# EAGLE board mrShark 01.a (EAGLE 5.11)
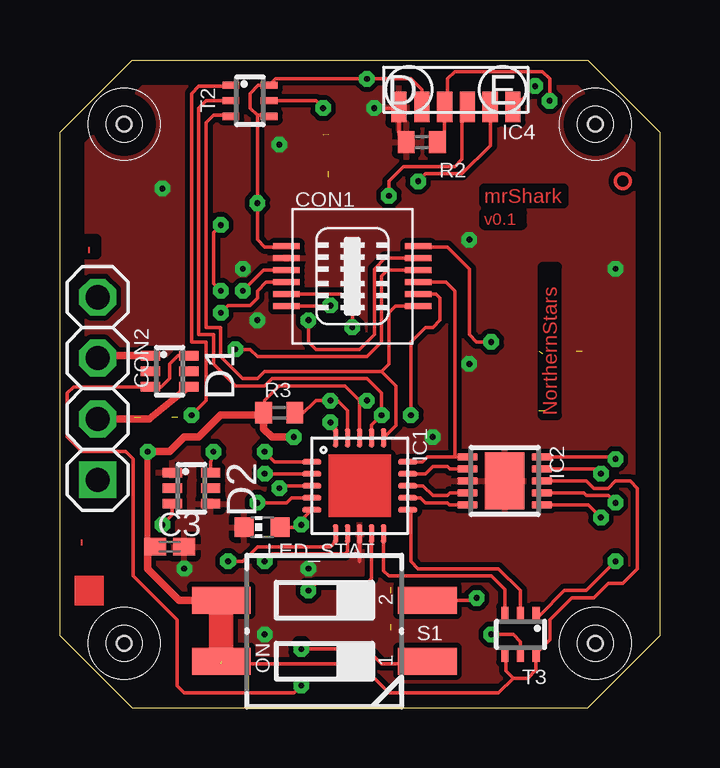
[diagram p0: board, top side]
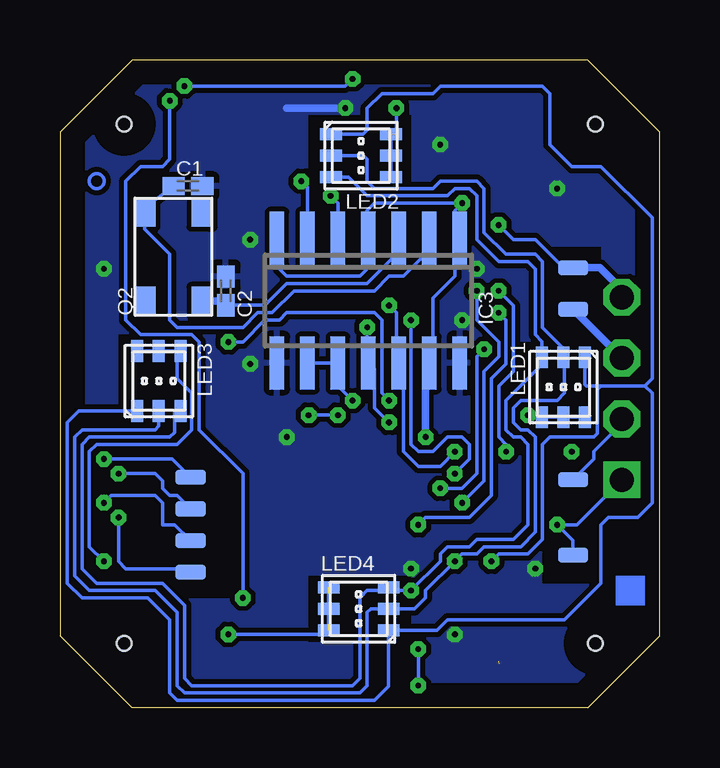
[diagram p1: board, bottom side, seen from below]

Size 25 x 27 mm. Coordinates in mm from the lower left corner, seen from the top.
Outline: 3,0 22,0 25,3 25,24 22,27 3,27 0,24 0,3 3,0
Copper layers (1*16): Top 0.035mm / dielectric 1.5mm / Bottom 0.035mm
Design rules "default": minimum track width 10mil, minimum drill 24mil, track to track 8mil, track to pad 8mil, pad to pad 8mil, via to via 8mil, smd to smd 8mil, copper to edge 40mil, drill to drill 8mil, minimum pad ring 10mil, minimum via ring 8mil, stop-mask expansion 4mil, vias tented up to drill 0mil, thermal gap 10mil
tRestrict: area 7.9,7 to 8.8,7.9
bRestrict: area 10.4,21.6 to 14.6,24.7; area 19.2,11.9 to 22.6,15.5; area 2.4,11.3 to 5.8,15.2; area 10.4,2.7 to 14.6,5.5; area 18,4.6 to 20.7,10.4; area 2.7,5.2 to 4.9,7.3; area 2.4,15.2 to 4.9,19.2

## Footprints (pad centres in the part's own frame; a part is rotated, then mirrored left to right if it is on the bottom)
SMD0,635-1,27 = smd 0.635 x 1.27: P$1 0,0
C0402K = smd 0.925 x 0.74: 1 -0.6,0; 2 0.6,0
DF23C-12DS = smd 0.25 x 1.1: 1 -1.25,-2.75; 2 -0.75,-2.75; 3 -0.25,-2.75; 4 0.25,-2.75; 5 0.75,-2.75; 6 1.25,-2.75; 7 1.25,2.75; 8 0.75,2.75; 9 0.25,2.75; 10 -0.25,2.75; 11 -0.75,2.75; 12 -1.25,2.75
1X04-S = drill 1.016 square: 1 -3.81,0 | drill 1.016 octagon: 2 -1.27,0; 3 1.27,0; 4 3.81,0
SOT363_PHILIPS = smd 0.4 x 0.8: 1 -0.65,-0.8; 2 0,-0.8; 3 0.65,-0.8; 4 0.65,0.8; 5 0,0.8; 6 -0.65,0.8
1,5 = hole 0.6: 0,0
MLF20 = smd 0.8 x 0.23: P$1 -2,1; P$2 -2,0.5; P$3 -2,0; P$4 -2,-0.5; P$5 -2,-1; P$11 2,-1; P$12 2,-0.5; P$13 2,0; P$14 2,0.5; P$15 2,1 | smd 0.23 x 0.8: P$6 -1,-2; P$7 -0.5,-2; P$8 0,-2; P$9 0.5,-2; P$10 1,-2; P$16 1,2; P$17 0.5,2; P$18 0,2; P$19 -0.5,2; P$20 -1,2
DFN10-3X3 = smd 0.3 x 0.85: 1 -1,-1.55; 2 -0.5,-1.55; 3 0,-1.55; 4 0.5,-1.55; 5 1,-1.55; 6 1,1.55; 7 0.5,1.55; 8 0,1.55; 9 -0.5,1.55; 10 -1,1.55 | smd 2.38 x 1.65: EXP 0,0
SO-14 = smd 0.6 x 2.2: 1 -3.81,-2.6; 2 -2.54,-2.6; 3 -1.27,-2.6; 4 0,-2.6; 5 1.27,-2.6; 6 2.54,-2.6; 7 3.81,-2.6; 8 3.81,2.6; 9 2.54,2.6; 10 1.27,2.6; 11 0,2.6; 12 -1.27,2.6; 13 -2.54,2.6; 14 -3.81,2.6
TFBS4711 = smd 0.635 x 1.27: 1 -2.38,0.72; 2 -1.43,0.72; 3 -0.48,0.72; 4 0.47,0.72; 5 1.42,0.72; 6 2.37,0.72
PLCC6 = smd 0.9 x 0.5: 1 1.25,-0.9; 2 1.25,0; 3 1.25,0.9; 4 -1.25,0.9; 5 -1.25,0; 6 -1.25,-0.9
CHIP-LED0603 = smd 0.8 x 0.8: A 0,-0.75; C 0,0.75
CFPX-104 = smd 1.2 x 0.9: P$1 -1.8,-1.2; P$2 1.9,1.2; P$3 -1.8,1.2; P$4 1.9,-1.2
R0402 = smd 0.7 x 0.9: 1 -0.65,0; 2 0.65,0
CTS-219-02 = smd 1.13 x 2.44: 1 -1.27,-4.3; 2 1.27,-4.3; 3 1.27,4.3; 4 -1.27,4.3
SOT363_INFINEON = smd 0.3 x 0.7: 1 -0.65,-0.8; 2 0,-0.8; 3 0.65,-0.8; 4 0.65,0.8; 5 0,0.8; 6 -0.65,0.8

## Placement (x,y rotation side)
BAT1+  [SMD0,635-1,27]  3.61,16.61 90 bottom
BAT1-  [SMD0,635-1,27]  3.61,18.34 90 bottom
BAT2+  [SMD0,635-1,27]  3.61,9.5 90 bottom
BAT2-  [SMD0,635-1,27]  3.61,6.35 90 bottom
C1  18p  [C0402K]  19.66,21.74 0 bottom
C2  18p  [C0402K]  18.08,17.37 90 bottom
C3  100n  [C0402K]  4.57,6.71 0 top
CON1  DF-23C-12DS-0.5V  [DF23C-12DS]  12.19,17.98 270 top
CON2  [1X04-S]  1.57,13.3 90 top
D1  BAS70-07S  [SOT363_PHILIPS]  4.57,14.02 270 top
D2  BAS70-07S  [SOT363_PHILIPS]  5.49,9.14 270 top
H1  MOUNT-HOLE1,5  [1,5]  2.68,2.68 0 top
H2  MOUNT-HOLE1,5  [1,5]  22.32,2.68 0 top
H3  MOUNT-HOLE1,5  [1,5]  22.32,24.32 0 top
H4  MOUNT-HOLE1,5  [1,5]  2.68,24.32 0 top
IC1  TINY4313MU  [MLF20]  12.5,9.25 0 top
IC2  A3901  [DFN10-3X3]  18.54,9.45 270 top
IC3  MCP2120-I/SL  [SO-14]  12.14,16.97 180 bottom
IC4  TFBS4711-TR1  [TFBS4711]  16.51,25.76 180 top
LED1  ASMT-YTD2-0BB02  [PLCC6]  4.01,13.36 90 bottom
LED2  ASMT-YTD2-0BB02  [PLCC6]  12.45,23.01 180 bottom
LED3  ASMT-YTD2-0BB02  [PLCC6]  20.88,13.61 270 bottom
LED4  ASMT-YTD2-0BB02  [PLCC6]  12.55,4.11 0 bottom
LED_STAT  green  [CHIP-LED0603]  8.43,7.52 90 top
MOTOR_L+  [SMD0,635-1,27]  19.56,9.6 90 bottom
MOTOR_L-  [SMD0,635-1,27]  19.56,8.28 90 bottom
MOTOR_R+  [SMD0,635-1,27]  19.56,6.96 90 bottom
MOTOR_R-  [SMD0,635-1,27]  19.56,5.64 90 bottom
Q2  14.7456MHz  [CFPX-104]  20.27,18.75 90 bottom
R2  1k  [R0402]  15.09,23.57 0 top
R3  1k  [R0402]  9.14,12.29 0 top
S1  MCEMR-02-T  [CTS-219-02]  11.02,3.2 90 top
T2  UMX3NTR  [SOT363_INFINEON]  7.92,25.3 270 top
T3  UMX3NTR  [SOT363_INFINEON]  19.2,3.05 180 top

## Library data of the parts
BAT1+ BAT1- BAT2+ BAT2- MOTOR_L+ MOTOR_L- MOTOR_R+ MOTOR_R- = wirepad
C1-C3 R2 R3 = rcl
CON1 = con-hirose
CON2 = pinhead-2
D1 D2 = diode
H1-H4 = holes
IC1 = avr-6
IC2 = allegro
IC3 = microchip
IC4 = vishay
LED1-LED4 LED_STAT = led
Q2 = crystal
S1 = switch-dil
T2 T3 = transistor-small-signal

## Nets
BAT1+: BAT1+.P$1 CON2.3 D1.1
BAT1-: BAT1-.P$1 CON2.4 D2.6
BAT2+: BAT2+.P$1 CON2.2 D1.4
BAT2-: BAT2-.P$1 CON2.1 D2.3
GND: C1.2 C2.2 C3.2 CON1.2 D2.1 D2.4 IC1.P$8 IC2.3 IC2.EXP IC3.8 IC3.14 IC4.6 LED_STAT.C R2.1
INT0: CON1.3 IC1.P$4
INT1: CON1.4 IC1.P$5 LED_STAT.A
LED1+: LED1.4 LED1.5 LED1.6 T2.1
LED2+: LED2.4 LED2.5 LED2.6 T2.5
LED3: IC1.P$11 T3.2
LED3+: LED3.4 LED3.5 LED3.6 T3.1
LED4: IC1.P$10 T3.3
LED4+: LED4.4 LED4.5 LED4.6 T3.5
LED_B: IC1.P$6 LED1.1 LED2.1 LED3.1 LED4.1
LED_G: IC1.P$7 LED1.2 LED2.2 LED3.2 LED4.2
LED_R: IC1.P$9 LED1.3 LED2.3 LED3.3 LED4.3
MISO/LED2: CON1.7 IC1.P$16 T2.3
MOSI/MOTOR_L_DIR: CON1.9 IC1.P$15 IC2.1
MOTOR_L+: IC2.10 MOTOR_L+.P$1
MOTOR_L-: IC2.9 MOTOR_L-.P$1
MOTOR_L_PWM: IC1.P$14 IC2.2
MOTOR_R+: IC2.7 MOTOR_R+.P$1
MOTOR_R-: IC2.6 MOTOR_R-.P$1
MOTOR_R_DIR: IC1.P$12 IC2.5
MOTOR_R_PWM: IC1.P$13 IC2.4
N$1: C2.1 IC3.3 Q2.P$1
N$2: C1.1 IC3.2 Q2.P$2
PA0: CON1.10 IC1.P$3
PA1: CON1.11 IC1.P$2
RESET: CON1.12 IC1.P$19 R3.2
RXD: CON1.5 IC1.P$20 IC3.11
RXIR: IC3.5 IC4.3
SCK/LED1: CON1.8 IC1.P$17 T2.2
T_IR: IC4.4 R2.2 S1.2
TXD: CON1.6 IC1.P$1 IC3.12
TXIR: IC3.6 IC4.2
VBAT: D1.3 D1.6 S1.1
VCC: C3.1 CON1.1 IC1.P$18 IC2.8 IC3.1 IC3.4 IC3.7 IC3.9 IC3.10 IC3.13 IC4.1 IC4.5 R3.1 S1.3 S1.4 T2.4 T2.6 T3.4 T3.6

## Tracks (layer width: path | path; a pad name or v marks a point on that pad's centre or on a via)
BAT1+
  Top 0.305: D1.1 1.67,14.67 CON2.3
  Bottom 0.305: CON2.3 BAT1+.P$1
BAT1-  (via drill 0.24, 0.24 pad 0.41)
  Top 0.152: D2.6 6.29,10.25 v6.4,10.67 | v6.71,20.12 6.4,19.81 6.4,17.68 v6.71,17.37
  Bottom 0.152: v6.4,10.67 6.4,10.97 6.71,11.28 6.71,13.41 6.1,14.02 6.1,16.76 v6.71,17.37 | v6.71,20.12 6.1,19.51 5.18,19.51 4.01,18.34 BAT1-.P$1
  Bottom 0.305: CON2.4 1.57,17.42 2.49,18.34 BAT1-.P$1
BAT2+
  Top 0.305: CON2.2 3.73,12.03 D1.4
  Bottom 0.152: 3.3,9.5 3.3,9.8 2.74,10.36 2.74,10.67 1.57,11.84 CON2.2
  Bottom 0.305: 3.3,9.5 BAT2+.P$1
BAT2-  (via drill 0.24 pad 0.41)
  Top 0.152: D2.3 4.69,8.04 v4.27,7.62
  Bottom 0.152: BAT2-.P$1 3.61,6.96 v4.27,7.62 3.44,7.62 CON2.1
GND  (via drill 0.24, 0.24 pad 0.41)
  Top 0.152: R2.1 14.14,23.87 IC4.6 14.1,24.99 v13.11,24.99 | IC1.P$8 12.5,6.1
  Bottom 0.305: v13.11,24.99 15.54,24.99
  other vias: 5.18,5.79 17.07,14.33 17.07,19.51 9.14,23.47 7.62,18.29 4.27,21.64 23.16,18.29 10.36,5.79 15.54,11.28 8.23,16.15 8.53,3.05
  pour Top: 0,3.05 0,24.08 3.05,27.13 21.95,27.13 24.99,24.08 24.99,3.05 21.95,0 3.05,0
  pour Bottom: 0,3.05 0,24.08 3.05,27.13 21.95,27.13 24.99,24.08 24.99,3.05 21.95,0 3.05,0
INT0  (via drill 0.24, 0.24 pad 0.41)
  Top 0.152: IC1.P$4 9.66,8.75 9.45,8.53 v8.23,8.53 | CON1.3 8.48,18.23 v7.62,17.37
  Bottom 0.152: v8.23,8.53 7.32,9.45 7.32,14.02 6.71,14.63 6.71,15.24 7.62,16.15 v7.62,17.37
INT1  (via drill 0.24)
  Top 0.152: 10.5,8.22 IC1.P$5 9.96,7.71 | LED_STAT.A 9.77,7.52 9.96,7.71 | 9.96,7.71 v10.06,7.62 | CON1.4 8.59,17.73 8.23,17.37 8.23,17.07 7.92,16.76 7.01,16.76 v6.71,16.46
  Bottom 0.152: v6.71,16.46 6.4,16.15 6.4,14.33 7.01,13.72 7.01,8.84 7.92,7.92 9.75,7.92 v10.06,7.62
LED1+  (via drill 0.24 pad 0.41)  (2 unrouted)
  Top 0.152: T2.1 7.08,25.91 5.79,25.91 5.49,25.6 5.49,15.24 6.1,15.24 6.1,12.8 v5.49,12.19
  Bottom 0.152: 3.35,12.11 LED1.5 4.66,12.11 5.41,12.11 v5.49,12.19
LED2+  (via drill 0.24 pad 0.41)  (2 unrouted)
  Top 0.152: T2.5 10.67,25.3 v10.97,24.99
  Bottom 0.152: 11.2,22.36 LED2.5 11.2,23.66 10.97,23.89 v10.97,24.99
LED3
  Top 0.152: IC1.P$11 14.63,8.11 14.63,6.1 14.94,5.79 18.29,5.79 19.2,4.88 T3.2
LED3+  (via drill 0.24 pad 0.41)  (2 unrouted)
  Top 0.152: T3.1 20,3.85 21.03,4.88 21.95,4.88 v23.16,6.1
  Bottom 0.152: 21.53,14.86 LED3.5 20.23,14.86 20.12,14.75 20.12,13.72 19.51,13.11 19.51,11.58 20.12,10.97 23.47,10.97 23.77,10.67 23.77,6.71 v23.16,6.1
LED4
  Top 0.152: IC1.P$10 13.5,5.71 13.72,5.49 17.98,5.49 18.55,4.92 T3.3
LED4+  (via drill 0.24 pad 0.41)  (2 unrouted)
  Top 0.152: T3.5 19.2,2.74 18.9,3.05 v17.98,3.05
  Bottom 0.152: 13.8,4.76 LED4.5 13.8,3.46 14.21,3.05 v17.98,3.05
LED_B  (via drill 0.24 pad 0.41)
  Top 0.152: IC1.P$6 11.5,6.92 11.28,6.71 8.23,6.71 7.62,6.1 v7.01,6.1
  Bottom 0.152: 0.61,13.41 0.3,13.72 0.3,20.42 2.44,22.55 3.66,22.55 4.57,23.47 4.57,25.6 4.88,25.91 9.14,25.91 9.45,25.6 11.58,25.6 12.19,24.99 12.19,24.08 12.36,23.91 LED2.1 | 0.61,13.41 2.44,13.41 | 2.44,13.41 3.05,13.41 3.1,13.47 LED1.1 | 0.61,13.41 0.3,13.11 0.3,8.53 0.91,7.92 2.13,7.92 2.44,7.62 2.44,5.18 3.96,3.66 8.84,3.66 9.28,3.21 LED4.1 11.3,0.89 11.89,0.3 20.12,0.3 20.42,0.61 20.42,3.66 21.34,4.57 24.08,4.57 24.69,5.18 24.69,11.89 24.21,12.36 LED3.1 | v7.01,6.1 6.71,6.4 5.49,6.4 4.88,7.01 4.88,10.97 4.57,11.28 2.74,11.28 2.59,11.43 2.59,13.26 2.44,13.41
LED_G  (via drill 0.24 pad 0.41)
  Top 0.152: IC1.P$7 12,6.51 11.89,6.4 8.84,6.4 v8.53,6.1
  Bottom 0.152: LED2.2 12.34,23.01 12.19,22.86 12.19,21.95 11.89,21.64 9.45,21.64 9.14,21.95 7.62,21.95 7.32,21.64 7.32,19.81 6.4,18.9 5.18,18.9 4.88,18.59 4.88,15.85 3.96,14.94 3.96,14.65 LED1.2 3.96,14.57 3.96,13.11 4.27,12.8 5.79,12.8 6.1,12.5 6.1,11.89 5.79,11.58 5.49,11.58 5.18,11.28 5.18,7.32 5.79,6.71 7.32,6.71 7.62,6.4 8.23,6.4 v8.53,6.1 9.75,4.88 9.75,4.57 10.21,4.12 LED4.2 12.04,4.12 12.19,3.96 12.19,0.91 12.5,0.61 19.81,0.61 20.12,0.91 20.12,3.96 21.03,4.88 23.77,4.88 24.38,5.49 24.38,11.28 24.08,11.58 21.03,11.58 20.88,11.73 LED3.2
LED_R  (via drill 0.24 pad 0.41)  (1 unrouted)
  Top 0.152: IC1.P$9 13,5.38 12.8,5.18 10.67,5.18 v10.36,4.88
  Bottom 0.152: 20.23,12.36 20.23,11.47 20.42,11.28 23.77,11.28 24.08,10.97 24.08,5.79 23.47,5.18 20.73,5.18 19.81,4.27 19.81,1.22 19.51,0.91 12.8,0.91 12.5,1.22 12.5,4.57 12.19,4.88 11.44,4.88 LED4.3 11.3,4.88 v10.36,4.88 9.14,6.1 9.14,6.4 8.84,6.71 7.92,6.71 7.62,7.01 6.1,7.01 5.49,7.62 5.49,10.97 5.79,11.28 6.1,11.28 6.4,11.58 6.4,12.8 4.91,14.3 LED1.3 4.91,15.27 5.18,15.54 5.18,18.29 5.49,18.59 6.71,18.59 7.62,19.51 7.62,21.34 7.92,21.64 8.53,21.64 8.84,21.34 12.19,21.34 12.97,22.11 LED2.3
MISO/LED2
  Top 0.152: 13.5,11.36 IC1.P$16 14.02,11.77 14.02,13.41 13.41,14.02 | T2.3 7.08,24.69 6.4,24.69 6.1,24.38 6.1,15.85 6.71,15.85 6.71,14.63 7.62,13.72 8.23,13.72 8.53,14.02 13.41,14.02 | CON1.7 13.99,16.73 13.72,16.46 13.72,14.33 13.41,14.02
MOSI/MOTOR_L_DIR
  Top 0.152: IC1.P$15 15.12,10.25 15.33,10.45 16.46,10.45 | 16.46,10.45 IC2.1 | CON1.9 16.1,17.73 16.46,17.37 16.46,10.45
MOTOR_L+  (via drill 0.24 pad 0.41)
  Top 0.152: IC2.10 23.08,10.45 v23.16,10.36
  Bottom 0.152: v23.16,10.36 20.32,10.36 MOTOR_L+.P$1
MOTOR_L-  (via drill 0.24 pad 0.41)
  Top 0.152: IC2.9 22.36,9.95 v22.55,9.75
  Bottom 0.152: v22.55,9.75 21.03,9.75 20.73,9.45 20.73,9.14 20.42,8.84 20.12,8.84 MOTOR_L-.P$1
MOTOR_L_PWM
  Top 0.152: IC1.P$14 15.23,9.75 15.54,10.06 16.15,10.06 16.26,9.95 IC2.2
MOTOR_R+  (via drill 0.24 pad 0.41)
  Top 0.152: IC2.7 21.84,8.95 21.95,8.84 22.86,8.84 v23.16,8.53
  Bottom 0.152: v23.16,8.53 22.86,8.84 21.03,8.84 20.73,8.53 20.73,7.62 20.22,7.62 MOTOR_R+.P$1
MOTOR_R-  (via drill 0.24 pad 0.41)
  Top 0.152: IC2.6 22.03,8.45 v22.55,7.92
  Bottom 0.152: v22.55,7.92 22.55,6.1 22.25,5.79 19.71,5.79 MOTOR_R-.P$1
MOTOR_R_DIR
  Top 0.152: IC1.P$12 15.03,8.75 15.24,8.53 16.15,8.53 16.24,8.45 IC2.5
MOTOR_R_PWM
  Top 0.152: IC1.P$13 15.14,9.25 15.54,8.84 16.15,8.84 16.26,8.95 IC2.4
N$1
  Bottom 0.152: C2.1 16.45,16.77 15.54,17.68 12.19,17.68 10.97,18.9 10.97,19.47 IC3.3
  Bottom 0.305: Q2.P$1 18.26,16.95 C2.1
N$2
  Bottom 0.152: IC3.2 9.75,19.41 9.75,18.9 10.67,17.98 11.28,17.98 11.89,17.37 15.24,17.37 16.15,16.46 16.76,16.46 17.37,15.85 20.12,15.85 20.42,16.15 20.42,18.9 21.47,19.95 Q2.P$2 21.47,20.84 C1.1
PA0  (via drill 0.24 pad 0.41)
  Top 0.152: IC1.P$3 9.25,9.25 v9.14,9.14 | v7.32,14.94 7.92,14.94 8.23,14.63 12.8,14.63 13.41,15.24 13.41,17.98 13.66,18.23 CON1.10
  Bottom 0.152: v7.32,14.94 7.62,14.63 7.62,9.75 8.23,9.14 v9.14,9.14
PA1  (via drill 0.24 pad 0.41)
  Top 0.152: IC1.P$2 8.54,9.75 v8.53,9.75 | v10.36,16.15 10.36,15.24 10.67,14.94 12.5,14.94 13.11,15.54 13.11,18.29 13.55,18.73 CON1.11
  Bottom 0.152: v8.53,9.75 7.92,10.36 7.92,10.97 8.23,11.28 8.84,11.28 9.45,10.67 10.06,10.67 10.36,10.97 v10.36,16.15
RESET  (via drill 0.24 pad 0.41)
  Top 0.152: IC1.P$19 12,12.39 11.58,12.8 v11.28,12.8 10.67,12.8 10.06,12.19 9.9,12.19 R3.2 | v17.98,15.24 17.37,15.24 17.07,15.54 17.07,18.29 16.15,19.2 14.94,19.2 CON1.12 14.97,19.2
  Bottom 0.152: v11.28,12.8 11.58,13.11 11.58,16.15 11.89,16.46 15.54,16.46 15.85,16.15 16.46,16.15 17.37,15.24 v17.98,15.24
RXD  (via drill 0.24 pad 0.41)
  Top 0.152: IC1.P$20 11.5,11.97 v11.28,11.89 | CON1.5 11.72,17.23 12.19,16.76 v12.19,15.85
  Bottom 0.152: v11.28,11.89 11.89,12.5 11.89,14.11 IC3.11 12.19,14.42 v12.19,15.85
RXIR  (via drill 0.24 pad 0.41)
  Top 0.152: IC4.3 16.76,24.81 16.76,22.86 16.46,22.55 14.33,22.55 13.72,21.95 v13.72,21.34
  Bottom 0.152: IC3.5 13.41,21.03 v13.72,21.34
SCK/LED1  (via drill 0.24 pad 0.41)
  Top 0.152: CON1.8 15.69,17.23 15.85,17.07 15.85,16.15 15.54,15.85 15.24,15.85 14.63,15.24 v14.63,12.19 | T2.2 6.1,25.3 5.79,24.99 5.79,15.54 6.4,15.54 6.4,14.33 7.32,13.41 8.53,13.41 8.84,13.72 12.8,13.72 13.41,13.11 v13.41,12.19 13,11.78 IC1.P$17
  Bottom 0.152: v13.41,12.19 v14.63,12.19
T_IR  (via drill 0.24 pad 0.41)
  Top 0.152: S1.2 17.27,4.47 v17.37,4.57 | 15.85,23.77 15.74,23.66 R2.2 16.04,23.87 IC4.4 16.15,25.15 16.15,26.21 16.46,26.52 20.12,26.52 20.42,26.21 v20.42,25.3
  Bottom 0.152: v20.42,25.3 20.42,22.86 20.73,22.55 21.64,22.55 22.25,21.95 22.25,16.15 21.64,15.54 19.51,15.54 19.2,15.24 19.2,11.58 17.37,9.75 v17.37,4.57
TXD  (via drill 0.24 pad 0.41)
  Top 0.152: IC1.P$1 8.96,10.25 v8.53,10.67 | CON1.6 10.7,16.73 v11.28,16.76
  Bottom 0.152: v8.53,10.67 9.14,10.06 10.06,10.06 10.67,10.67 10.67,14.16 IC3.12 10.97,14.57 10.97,16.46 v11.28,16.76
TXIR  (via drill 0.24 pad 0.41)
  Top 0.152: v14.94,21.95 15.24,22.25 16.76,22.25 17.94,23.43 IC4.2
  Bottom 0.152: IC3.6 14.68,21.69 v14.94,21.95
VBAT  (via drill 0.24 pad 0.41)
  Top 0.152: v10.06,0.91 9.75,0.61 5.18,0.61 4.88,0.91 4.88,3.66 3.05,5.49 3.05,10.36 2.74,10.67 0.91,10.67 0.3,11.28 0.3,13.11 0.57,13.37 D1.3 4.23,13.37 4.57,13.72 4.57,14.33 4.92,14.67 D1.6 | v10.06,2.44 12.8,2.44 13.41,1.83 15.22,1.83 S1.1
  Bottom 0.152: v10.06,0.91 v10.06,2.44
VCC  (via drill 0.24 pad 0.41)  (1 unrouted)
  Top 0.152: 18.9,1.22 19.51,1.22 19.85,1.56 T3.6 20.42,2.82 20.42,3.66 21.34,4.57 22.25,4.57 22.86,5.18 23.47,5.18 24.08,5.79 24.08,9.14 23.77,9.45 23.16,9.45 22.86,9.14 22.25,9.14 21.95,9.45 IC2.8 | 18.9,1.22 18.59,1.52 18.59,2.21 T3.4 | 8.23,24.69 7.92,24.99 7.92,25.6 8.27,25.95 T2.6 8.99,26.21 v12.8,26.21 14.63,26.21 15.09,25.75 IC4.5 | 8.23,24.69 8.68,24.69 T2.4 8.77,24.69 | IC4.1 18.94,25.04 v19.81,25.91 | 6.71,1.83 12.5,1.83 13.72,0.61 18.29,0.61 18.9,1.22 | R3.1 8.53,12.33 8.53,12.8 9.14,13.41 11.89,13.41 12.5,12.8 | CON1.1 9.41,19.2 8.53,19.2 8.23,19.51 v8.23,21.03 8.23,24.69 | 12.5,12.8 IC1.P$18 | 12.5,12.8 v12.8,12.8 | 3.66,6.71 C3.1
  Top 0.254: v3.66,10.67 3.66,7.02 C3.1
  Top 0.305: v9.75,11.28 8.84,11.28 8.49,11.62 R3.1 8.39,12.19 6.71,12.19 5.79,11.28 5.18,11.28 4.57,10.67 v3.66,10.67 | S1.3 4.98,4.47 3.66,5.79 3.66,6.71
  Top 1.016: S1.4 S1.3
  Bottom 0.152: IC3.9 IC3.10 13.41,13.41 v12.8,12.8 | IC3.4 12.14,18.34 12.19,18.29 | IC3.7 15.85,19.47 15.85,18.29 15.54,17.98 12.5,17.98 12.19,18.29 | IC3.13 9.45,14.52 | 8.23,19.2 8.33,19.3 IC3.1 8.53,19.36 | 9.75,13.72 9.45,13.72 9.45,17.07 8.53,17.98 8.53,19.36 | 8.53,19.36 8.53,20.73 v8.23,21.03 11.89,21.03 12.19,20.73 12.19,18.29 | v19.81,25.91 13.11,25.91 v12.8,26.21
  Bottom 0.305: 9.45,14.21 IC3.13 9.75,14.21 9.75,13.72 v9.75,11.28
(copper drawn outside any net)
  shapes: Bottom area x1, Bottom circle x1, Top area x1, Top circle x1

## Text on the board
Top: mrShark | v0.1 | - | NorthernStars | -